# EAGLE board Cizgi_Sensoru (EAGLE 9.6.1)
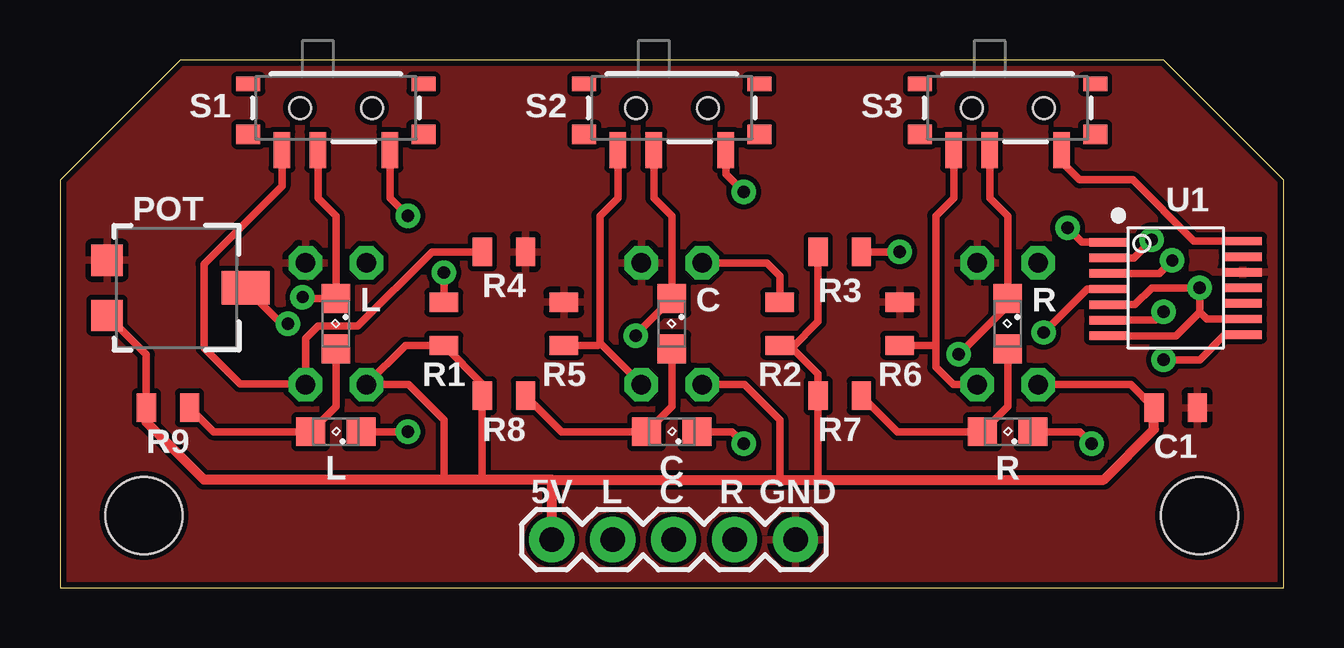
[diagram p0: board, top side]
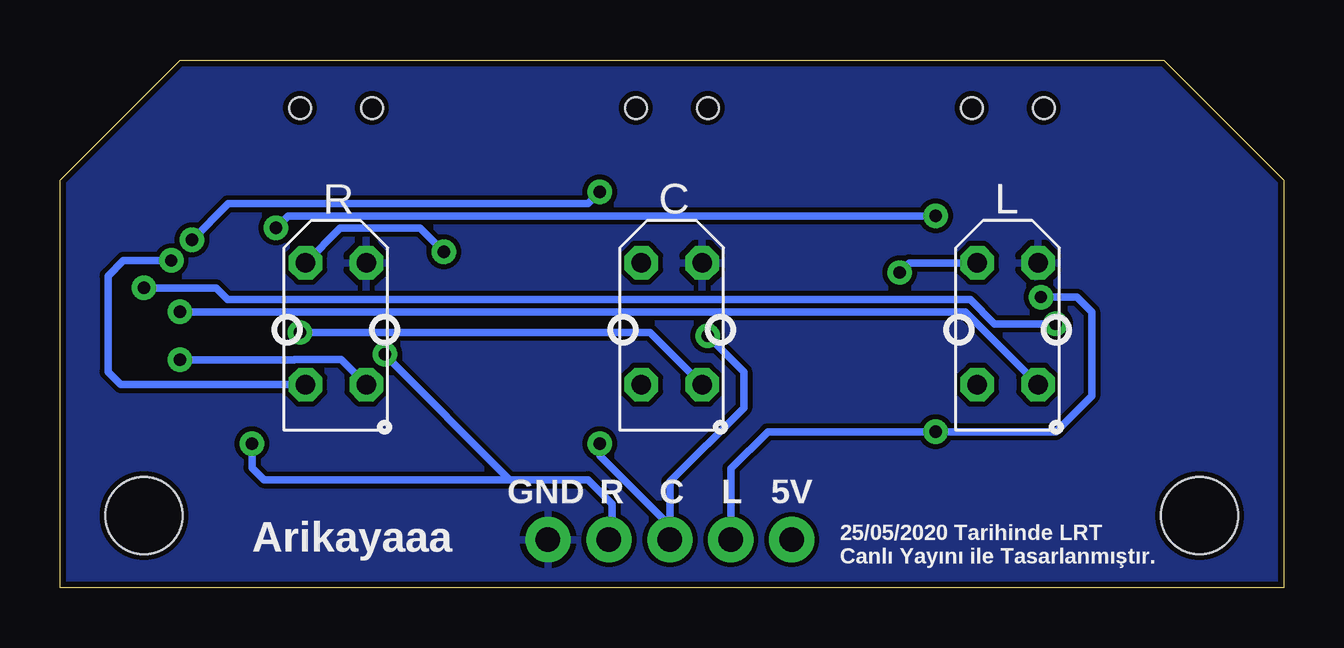
[diagram p1: board, bottom side, seen from below]

Size 51 x 22 mm. Coordinates in mm from the lower left corner, seen from the top.
Outline: 0,0 51,0 51,17 46,22 5,22 0,17 0,0
Copper layers (1*16): Top 0.035mm / dielectric 1.5mm / Bottom 0.035mm
Design rules "SparkFun": minimum track width 8mil, minimum drill 20mil, track to track 8mil, track to pad 8mil, pad to pad 8mil, via to via 8mil, smd to smd 8mil, copper to edge 10mil, drill to drill 8mil, minimum pad ring 12mil, minimum via ring 10mil, stop-mask expansion 4mil, vias tented up to drill 25mil, thermal gap 10mil
Holes 3.2 mm at 3.5,3 47.5,3

## Footprints (pad centres in the part's own frame; a part is rotated, then mirrored left to right if it is on the bottom)
TCRT5000 = drill 0.8 octagon: A -2.54,-1.27; C 2.54,-1.27; E 2.54,1.27; K -2.54,1.27
0805 = smd 0.8 x 1.2: 1 -0.9,0; 2 0.9,0
1X05 = drill 1.016 pad 1.88: 1 0,0; 2 2.54,0; 3 5.08,0; 4 7.62,0; 5 10.16,0
SML0805 = smd 1.2 x 1.2: A 1.05,0; C -1.05,0
TRIMPOT-SMD-5MM = smd 1.3 x 1.3: A 1.15,-2.54; C -1.15,-2.54 | smd 1.402 x 2: B 0,3.239
SWITCH_SPST_SMD_A = smd 0.7 x 1.5: 1 -2.25,-1.75; 2 -0.75,-1.75; 3 2.25,-1.75 | smd 1 x 0.6: GND1 -3.65,1; GND3 3.65,1 | smd 1 x 0.8: GND2 -3.65,-1.1; GND4 3.65,-1.1 | hole 0.9: -1.5,0; 1.5,0
TSSOP-14 = smd 1.6 x 0.35: 1 -2.8,1.9; 2 -2.8,1.25; 3 -2.8,0.6; 4 -2.8,-0.05; 5 -2.8,-0.7; 6 -2.8,-1.35; 7 -2.8,-2; 8 2.8,-1.95; 9 2.8,-1.3; 10 2.8,-0.65; 11 2.8,0; 12 2.8,0.65; 13 2.8,1.3; 14 2.8,1.95

## Placement (x,y rotation side)
C  [TCRT5000]  25.5,11 270 bottom
C1  100nF  [0805]  46.5,7.5 0 top
J4  [1X05]  20.5,2 0 top
L  [TCRT5000]  11.5,11 270 bottom
LED1  [SML0805]  39.5,11 270 top
LED2  [SML0805]  25.5,11 270 top
LED3  [SML0805]  11.5,11 270 top
LED4  [SML0805]  11.5,6.5 180 top
LED5  [SML0805]  25.5,6.5 180 top
LED6  [SML0805]  39.5,6.5 180 top
POT  5k  [TRIMPOT-SMD-5MM]  4.5,12.5 270 top
R  [TCRT5000]  39.5,11 270 bottom
R1  220  [0805]  16,11 90 top
R2  220  [0805]  30,11 90 top
R3  220  [0805]  32.5,14 0 top
R4  10k  [0805]  18.5,14 180 top
R5  10k  [0805]  21,11 270 top
R6  10k  [0805]  35,11 270 top
R7  220  [0805]  32.5,8 180 top
R8  220  [0805]  18.5,8 180 top
R9  220  [0805]  4.5,7.5 180 top
S1  [SWITCH_SPST_SMD_A]  11.5,20 0 top
S2  [SWITCH_SPST_SMD_A]  25.5,20 0 top
S3  [SWITCH_SPST_SMD_A]  39.5,20 0 top
U1  LM339PWR  [TSSOP-14]  46.5,12.5 0 top

## Library data of the parts
C L R = tcrt5000
C1 = SparkFun-Capacitors; PROD_ID: CAP-08469
J4 = SparkFun-Connectors
LED1-LED6 = led
POT = SparkFun-Resistors; PROD_ID: RES-11156
R1-R9 = SparkFun-Resistors; PROD_ID: RES-09883
S1-S3 = SparkFun-Switches; PROD_ID: SWCH-10651; SF_SKU: COM-10860
U1 = SparkFun-IC-Amplifiers; PROD_ID: IC-09990

## Nets
5V: C1.1 C.C J4.1 L.C POT.A R1.1 R2.1 R3.1 R7.2 R8.2 R9.2 R.C U1.3
GND: C1.2 C.K J4.5 L.K POT.C R4.1 R5.1 R6.1 R.K U1.12
N$1: L.A R1.2
N$2: C.A R2.2
N$3: R3.2 R.A
N$4: POT.B U1.5 U1.7 U1.9
N$5: LED1.A LED6.A R7.1
N$6: LED2.A LED5.A R8.1
N$7: LED3.A LED4.A R9.1
SENSOR_C: J4.3 LED2.C LED5.C S2.2
SENSOR_C_A: C.E R5.2 S2.1 U1.4
SENSOR_C_D: S2.3 U1.2
SENSOR_L: J4.2 LED3.C LED4.C S1.2
SENSOR_L_A: L.E R4.2 S1.1 U1.6
SENSOR_L_D: S1.3 U1.1
SENSOR_R: J4.4 LED1.C LED6.C S3.2
SENSOR_R_A: R6.2 R.E S3.1 U1.8
SENSOR_R_D: S3.3 U1.14

## Tracks (layer width: path | path; a pad name or v marks a point on that pad's centre or on a via)
5V  (via drill 0.51)
  Top 0.305: 17.5,4.5 17.6,4.6 R8.2 17.6,8.5 R1.1 14.41,10.1 L.C 14.54,8.46 16,7 16,4.5 | R3.1 31.6,11.1 30.5,10 | R2.1 30.1,10 30.5,10 | 30.5,10 31.6,8.9 R7.2 31.6,4.6 31.5,4.5 | C.C 28.54,8.46 30,7 30,4.5 | R.C 44.64,8.46 C1.1 | U1.3 45.82,13.1 v46.36,13.64 | R9.2 3.6,9.71 POT.A
  Top 0.406: J4.1 20.5,4.5 | 20.5,4.5 17.5,4.5 16,4.5 6,4.5 3.6,6.9 R9.2 | 20.5,4.5 30,4.5 31.5,4.5 43.5,4.5 45.6,6.6 C1.1
  Bottom 0.305: v46.36,13.64 48.36,13.64 49,13 49,9 48.46,8.46 R.C
GND
  pour Top: -2,24 -2,-2 53,-2 53,24
  pour Bottom: -4,26 -4,-4 55,-4 55,26
N$1  (via drill 0.51)
  Top 0.305: R1.2 v16,13.14
  Bottom 0.305: v16,13.14 15.6,13.54 L.A
N$2
  Top 0.305: R2.2 30,13 29.46,13.54 C.A
N$3  (via drill 0.51)
  Top 0.305: R3.2 v35,14
  Bottom 0.305: v35,14 35.99,14.99 39.32,14.99 R.A
N$4  (via drill 0.51)
  Top 0.305: POT.B 9.24,11 v9.5,11 | 47.5,11.5 v47.5,12.5 45.5,12.5 44.8,11.8 U1.5 | 47.5,11.5 47.8,11.2 U1.9 | 47.5,11.5 46.5,10.5 U1.7
  Bottom 0.305: v9.5,11 12.05,11 13.06,12.01 40,12.01 44.01,12.01 44.5,12.5 v47.5,12.5
N$5
  Top 0.305: LED1.A 39.5,7.55 LED6.A 34.9,6.5 R7.1
N$6
  Top 0.305: LED2.A 25.5,7.55 LED5.A 20.9,6.5 R8.1
N$7
  Top 0.305: R9.1 6.4,6.5 LED4.A 11.5,7.55 LED3.A
SENSOR_C  (via drill 0.51)
  Top 0.305: S2.2 24.75,16.25 25.5,15.5 LED2.C 24,10.55 v24,10.5 | LED5.C 28,6.5 v28.5,6
  Bottom 0.305: v28.5,6 28.5,5.5 25.58,2.58 J4.3 25.58,4.42 22.5,7.5 22.5,9 v24,10.5
SENSOR_C_A  (via drill 0.51)
  Top 0.305: U1.4 42.81,12.45 v41,10.64 | S2.1 23.25,16.25 22.5,15.5 22.5,10.19 | 22.5,10.19 C.E | R5.2 22.41,10.1 22.5,10.19
  Bottom 0.305: C.E 26.41,10.64 v41,10.64
SENSOR_C_D  (via drill 0.51)
  Top 0.305: U1.2 44.75,13.75 v45.5,14.5 | v28.5,16.5 27.75,17.25 S2.3
  Bottom 0.305: v45.5,14.5 43.99,16.01 28.99,16.01 v28.5,16.5
SENSOR_L  (via drill 0.51)
  Top 0.305: S1.2 10.75,16.25 11.5,15.5 LED3.C 10.17,12.05 v10.11,12.11 | LED4.C v14.5,6.5
  Bottom 0.305: J4.2 23.04,4.96 21.5,6.5 v14.5,6.5 9.5,6.5 8,8 8,11.5 8.61,12.11 v10.11,12.11
SENSOR_L_A  (via drill 0.51)
  Top 0.305: v46,11.5 45.65,11.15 U1.6 | S1.1 9.25,16.75 6,13.5 6,10 7.5,8.5 10.19,8.5 L.E 10.23,10.38 10.75,10.91 12.41,10.91 15.5,14 R4.2
  Bottom 0.305: L.E 13.27,11.5 v46,11.5
SENSOR_L_D  (via drill 0.51)
  Top 0.305: v14.5,15.5 14,16 13.75,16.25 S1.3 | v42,15 42.6,14.4 U1.1
  Bottom 0.305: v14.5,15.5 41.5,15.5 v42,15
SENSOR_R  (via drill 0.51)
  Top 0.305: S3.2 38.75,16.25 39.5,15.5 LED1.C 39.5,11.77 v37.46,9.73 | LED6.C 42.5,6.5 v43,6
  Bottom 0.305: v43,6 43,5 42.5,4.5 32.27,4.5 | J4.4 28,2.12 28,3.5 29,4.5 32.27,4.5 | v37.46,9.73 32.27,4.5
SENSOR_R_A  (via drill 0.51)
  Top 0.305: v46,9.5 47.5,9.5 48.55,10.55 U1.8 | S3.1 37.25,16.25 36.5,15.5 36.5,10.19 | 36.5,10.19 36.5,9.19 37.23,8.46 R.E | R6.2 36.41,10.1 36.5,10.19
  Bottom 0.305: v46,9.5 41.23,9.5 41.21,9.52 39.29,9.52 R.E
SENSOR_R_D
  Top 0.305: U1.14 47.27,14.45 44.71,17.01 42.49,17.01 41.75,17.75 S3.3

## Text on the board
tPlace: L | C | R | L | C | R | 5V | L | C | R | GND
bPlace: 5V | L | C | R | GND | Arikayaaa | 25/05/2020 Tarihinde LRT / Canlı Yayını ile Tasarlanmıştır.